# EAGLE board UHS_mini (EAGLE 5.07)
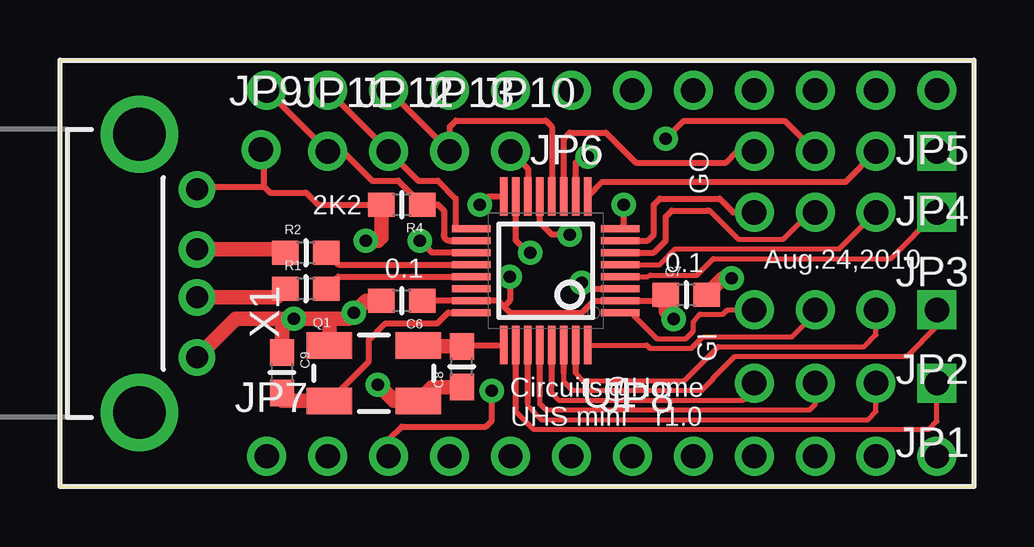
[diagram p0: board, top side]
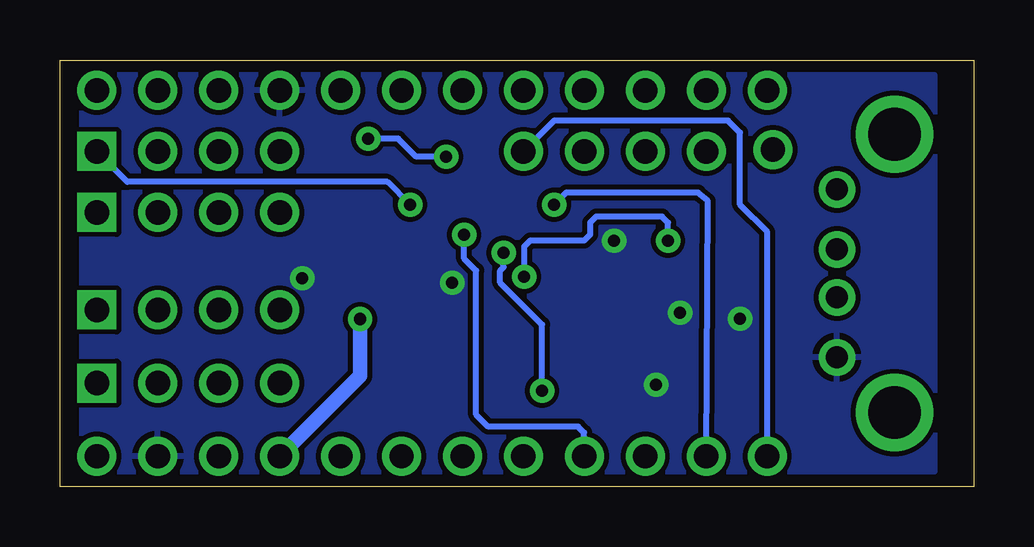
[diagram p1: board, bottom side, seen from below]

Size 38.1 x 17.78 mm. Coordinates in mm from the lower left corner, seen from the top.
Outline: 0,0 38.1,0 38.1,17.78 0,17.78 0,0
Copper layers (1*16): Top 0.035mm / dielectric 1.5mm / Bottom 0.035mm
Design rules "CHome *": minimum track width 8mil, minimum drill 20mil, track to track 8mil, track to pad 8mil, pad to pad 8mil, via to via 8mil, smd to smd 8mil, copper to edge 10mil, drill to drill 8mil, minimum pad ring 12mil, minimum via ring 10mil, stop-mask expansion 4mil, vias tented up to drill 20mil, thermal gap 10mil

## Footprints (pad centres in the part's own frame; a part is rotated, then mirrored left to right if it is on the bottom)
0603 = smd 1.1 x 1: 1 -0.85,0; 2 0.85,0
1X04 = drill 1.016 square: 1 0,0 | drill 1.016 round: 2 2.54,0; 3 5.08,0; 4 7.62,0
1X06 = drill 1.016 round: 1 0,0; 2 2.54,0; 3 5.08,0; 4 7.62,0; 5 10.16,0; 6 12.7,0
1X01 = drill 1.016 round: 1 0,0
CRYSTAL-SMD-5X3 = smd 1.9 x 1.1: 1 -1.85,-1.15; 2 1.85,-1.15; 3 1.85,1.15; 4 -1.85,1.15
TQFP32_8MIL = smd 0.294 x 1.6: 1 -1.75,-3.1; 2 -1.25,-3.1; 3 -0.75,-3.1; 4 -0.25,-3.1; 5 0.25,-3.1; 6 0.75,-3.1; 7 1.25,-3.1; 8 1.75,-3.1; 17 1.75,3.1; 18 1.25,3.1; 19 0.75,3.1; 20 0.25,3.1; 21 -0.25,3.1; 22 -0.75,3.1; 23 -1.25,3.1; 24 -1.75,3.1 | smd 1.6 x 0.294: 9 3.1,-1.75; 10 3.1,-1.25; 11 3.1,-0.75; 12 3.1,-0.25; 13 3.1,0.25; 14 3.1,0.75; 15 3.1,1.25; 16 3.1,1.75; 25 -3.1,1.75; 26 -3.1,1.25; 27 -3.1,0.75; 28 -3.1,0.25; 29 -3.1,-0.25; 30 -3.1,-0.75; 31 -3.1,-1.25; 32 -3.1,-1.75
USB-A-H = drill 0.914 round: D+ 2.4,-1; D- 2.4,1; GND 2.4,-3.5; VBUS 2.4,3.5 | drill 2.2 round: GND@1 0,5.8; GND@2 0,-5.8

## Placement (x,y rotation side)
C6  0.1uF  [0603]  14.25,7.75 180 top
C7  0.1uF  [0603]  26.11,8 0 top
C8  18pF  [0603]  16.75,5 90 top
C9  18pF  [0603]  9.25,4.75 270 top
JP1  [1X04]  36.56,4.32 180 top
JP2  [1X04]  36.56,7.37 180 top
JP3  [1X04]  36.56,11.43 180 top
JP4  [1X04]  36.56,13.97 180 top
JP5  [1X06]  36.56,16.51 180 top
JP6  [1X06]  21.32,16.51 180 top
JP7  [1X06]  8.62,1.27 0 top
JP8  [1X06]  23.86,1.27 0 top
JP9  VBUS  [1X01]  8.38,14.05 0 top
JP10  SS  [1X01]  18.78,13.97 0 top
JP11  INT  [1X01]  11.16,13.97 0 top
JP12  GPX  [1X01]  13.7,13.97 0 top
JP13  MAX_RST  [1X01]  16.24,13.97 0 top
Q1  12MHz  [CRYSTAL-SMD-5X3]  13.08,4.73 0 top
R1  33 1%  [0603]  10.25,8.25 0 top
R2  33 1%  [0603]  10.25,9.75 0 top
R4  2.2K  [0603]  14.25,11.75 180 top
U1  MAX3421E  [TQFP32_8MIL]  20.25,9 90 top
X1  USB-A-H  [USB-A-H]  3.31,8.89 0 top

## Library data of the parts
C6-C9 Q1 R1 R2 R4 = CH_passive
JP1-JP13 X1 = CH_connectors
U1 = CH_Maxim

## Nets
A0: JP7.5
A1: JP7.6
A2: JP8.1
A3: JP8.2
D2: JP5.5
D3: JP5.6
D4: JP6.1
D5: JP6.2
D6: JP6.3
GI0: JP1.1 U1.26
GI1: JP1.2 U1.27
GI2: JP1.3 U1.28
GI3: JP1.4 U1.29
GI4: JP2.1 U1.30
GI5: JP2.2 U1.31
GI6: JP2.3 U1.32
GI7: JP2.4 U1.1
GND: C6.2 C7.2 C8.1 C9.1 JP5.4 JP8.5 Q1.2 Q1.4 U1.3 U1.19 X1.GND
GO0: JP3.1 U1.4
GO1: JP3.2 U1.5
GO2: JP3.3 U1.6
GO3: JP3.4 U1.7
GO4: JP4.1 U1.8
GO5: JP4.2 U1.9
GO6: JP4.3 U1.10
GO7: JP4.4 U1.11
GPX: JP6.5 JP12.1 U1.17
INT: JP6.6 JP11.1 R4.1 U1.18
MAX_RST: JP6.4 JP13.1 U1.12
MISO: JP7.3 U1.15
MOSI: JP7.2 U1.16
N$8: R1.2 U1.21
N$16: R2.2 U1.20
N$40: C8.2 Q1.3 U1.25
N$41: C9.2 Q1.1 U1.24
N$45: R1.1 X1.D+
N$54: R2.1 X1.D-
RAW: JP8.6
RES1: JP8.4
RESET: JP5.3
RXI: JP5.2
SCLK: JP7.4 U1.13
SS: JP7.1 JP10.1 U1.14
TXO: JP5.1
VCC: C6.1 C7.1 JP8.3 JP9.1 R4.2 U1.2 U1.23 X1.VBUS

## Tracks (layer width: path | path; a pad name or v marks a point on that pad's centre or on a via)
GI0
  Top 0.203: JP1.1 36.56,2.72 36.23,2.39 19.75,2.39 19,3.13 19,3.25
  Top 0.254: 19,3.25 U1.26
GI1
  Top 0.203: JP1.2 34.02,3.12 33.69,2.79 20.05,2.79 19.5,3.34 19.5,3.5
  Top 0.254: 19.5,3.5 U1.27
GI2
  Top 0.203: JP1.3 31.48,3.43 31.25,3.2 20.25,3.2 20,3.45 20,3.75
  Top 0.254: 20,3.75 U1.28
GI3
  Top 0.203: JP1.4 28.94,4.06 28.48,3.61 20.79,3.61 20.5,3.89 20.5,4.25
  Top 0.254: 20.5,4.25 U1.29
GI4
  Top 0.203: 21,4.75 21,4.38 21.37,4.01 26.76,4.01 27.24,4.5 27.24,4.55 28.13,5.44 35.31,5.44 36.56,6.68 JP2.1
  Top 0.254: 21,4.75 U1.30
GI5
  Top 0.203: 21.5,4.75 21.5,4.72 21.8,4.42 26.02,4.42 27.44,5.84 33.54,5.84 34.02,6.33 JP2.2
  Top 0.254: 21.5,4.75 U1.31
GI6
  Top 0.203: U1.32 24.46,5.9 24.6,5.77 26.32,5.77 26.81,6.25 30.52,6.25 31.48,7.21 JP2.3
GI7
  Top 0.203: U1.1 23.39,7.21 23.91,7.21 23.91,7.14 24.88,6.17 26.09,6.17 26.4,6.48 26.4,6.86 26.68,7.19 27.64,7.19 27.82,7.37 JP2.4
GND  (via drill 0.51)
  Top 0.254: U1.3 22,8.25 v21.75,8.5 | U1.19 15.5,9.75 v15,10.25 | 11.23,6.98 11.25,7 11.75,7
  Top 0.61: C6.2 12.75,7.75 v12.25,7.25 12,7 11.75,7 v9.75,7 9.25,7 | v28,8.69 27.64,8.69 C7.2 | 9.25,7 C9.1 | C8.1 15.5,4.15 Q1.2 13.92,3.58 v13.25,4.25 | 11.23,6.98 Q1.4 | X1.GND 7.32,7 9.25,7
  pour Bottom: 1.64,17.14 37.2,17.14 37.2,0.64 1.64,0.64
GO0
  Top 0.203: JP3.1 34.63,9.5 27.24,9.5 26.55,8.81 24.6,8.81 24.51,8.75 U1.4
GO1
  Top 0.203: U1.5 25,9.25 25.66,9.91 32.5,9.91 JP3.2
GO2
  Top 0.203: JP3.3 31.28,11.43 30.16,10.31 28.29,10.31 27.1,11.5 27,11.5
  Top 0.254: U1.6 24.75,9.75 25.25,10.25 25.25,11.25 25.5,11.5 27,11.5
GO3
  Top 0.254: U1.7 24.5,10.25 24.75,10.5 24.75,11.75 25,12 27.5,12 28.07,11.43 JP3.4
GO4  (via drill 0.51)
  Top 0.254: v23.5,11.75 23.5,10.9 U1.8
  Bottom 0.254: JP4.1 35.29,12.7 24.45,12.7 v23.5,11.75
GO5
  Top 0.254: JP4.2 32.75,12.7 22.6,12.7 U1.9
GO6  (via drill 0.51)
  Top 0.254: JP4.3 30.21,15.24 25.99,15.24 v25.25,14.5 | v22,13.75 21.75,13.75 21.5,13.5 U1.10
  Bottom 0.254: v25.25,14.5 24,14.5 23.25,13.75 v22,13.75
GO7
  Top 0.254: U1.11 21,14.5 21.25,14.75 22.75,14.75 24,13.5 27.75,13.5 28.22,13.97 JP4.4
GPX
  Top 0.254: U1.17 16.5,10.75 16.5,12.01 15.75,12.75 14.92,12.75 JP12.1 JP6.5
INT
  Top 0.254: JP11.1 | JP11.1 JP6.6 | U1.18 16.25,10.25 arc-90 16,10.5 16,11.5 15.75,11.75 R4.1 | R4.1 15.39,11.5 | JP11.1 11.78,13.97 13,12.75 14.1,12.75 R4.1
MAX_RST
  Top 0.254: U1.12 20.5,15 20.25,15.25 16.5,15.25 16.25,15 JP13.1 JP6.4
MISO  (via drill 0.51)
  Top 0.254: U1.15 19,10.25 19.43,9.82 arc45 v19.61,9.75 | JP7.3 13.7,1.95 14.25,2.5 17.75,2.5 18,2.75 v18,4
  Bottom 0.254: v19.61,9.75 19.61,9.14 19.75,9 19.75,8.5 18,6.75 v18,4
MOSI  (via drill 0.51)
  Top 0.254: U1.16 17.85,12.1 v17.5,11.75
  Bottom 0.254: JP7.2 11.09,11.91 11.5,12.25 17,12.25 v17.5,11.75
N$8
  Top 0.254: U1.21 11.6,8.75 R1.2
N$16
  Top 0.254: U1.20 11.6,9.25 R2.2
N$40
  Top 0.254: C8.2 16.75,5.9 U1.25
  Top 0.61: Q1.3 14.93,5.85 C8.2
N$41
  Top 0.254: U1.24 16.18,7.25 15.74,6.81 13.56,6.81 12.88,6.13 12.88,5.23 Q1.1
  Top 0.61: C9.2 9.25,3.58 Q1.1
N$45
  Top 0.254: 9.04,7.89 R1.1
  Top 0.61: X1.D+ 9.04,7.89
N$54
  Top 0.254: 9.26,9.89 R2.1
  Top 0.61: X1.D- 9.26,9.89
SCLK  (via drill 0.51)
  Top 0.254: U1.13 20,11 20.5,10.5 v21.25,10.5
  Bottom 0.254: JP7.4 16.25,2.25 16.5,2.5 20.25,2.5 20.75,3 20.75,9 21.25,9.5 v21.25,10.5
SS
  Top 0.254: U1.14 19.5,13.25 JP10.1
  Bottom 0.254: JP10.1 17.5,15.25 10.25,15.25 9.75,14.75 9.75,11.75 8.62,10.62 JP7.1
VCC  (via drill 0.51)
  Top 0.254: C6.1 U1.23 18.25,7.75 18.5,7.5 | 8.45,14.05 JP9.1 8.5,13.93 8.5,12.5 | 18.5,7.5 18.75,7.25 21.75,7.25 22.25,7.75 U1.2 25.01,7.75 | v18.75,8.75 18.75,7.75 18.5,7.5 | 13.4,10.4 13.25,10.25 | R4.2 10.75,11.75 10.25,12.25 8.75,12.25 8.5,12.5 | X1.VBUS 5.82,12.5 8.5,12.5
  Top 0.61: R4.2 13.4,10.4 | 13.25,10.25 v12.75,10.25 | 25.01,7.75 C7.1 25.26,7.32 v25.59,6.99
  Bottom 0.254: v18.75,8.75 18.75,10 18.5,10.25 16.25,10.25 16,10.5 16,11 15.75,11.25 13,11.25 12.75,11 v12.75,10.25
  Bottom 0.61: v25.59,6.99 25.59,4.62 JP8.3

## Text on the board
tPlace: GO | 2K2 | 0.1 | 0.1 | Aug.24,2010 | GI | Circuits@Home | UHS mini | r1.0
Document: Released under Creative Commons Attribution-NonCommercial-ShareAlike License | http://creativecommons.org/licenses/by-nc-sa/3.0/